# Altium PCB Resolver_PCB.PcbDoc (part 1 of 2)
Units mm, origin at the board's own origin, x right, y up, seen from the top; angles counter-clockwise.
Board outline 113.4 x 54.46 mm, 2 copper layers (Top Layer, Bottom Layer); 126 components, 86 nets, 363 pads, 149 vias.
Unrouted connection lines stored in the file: 1.
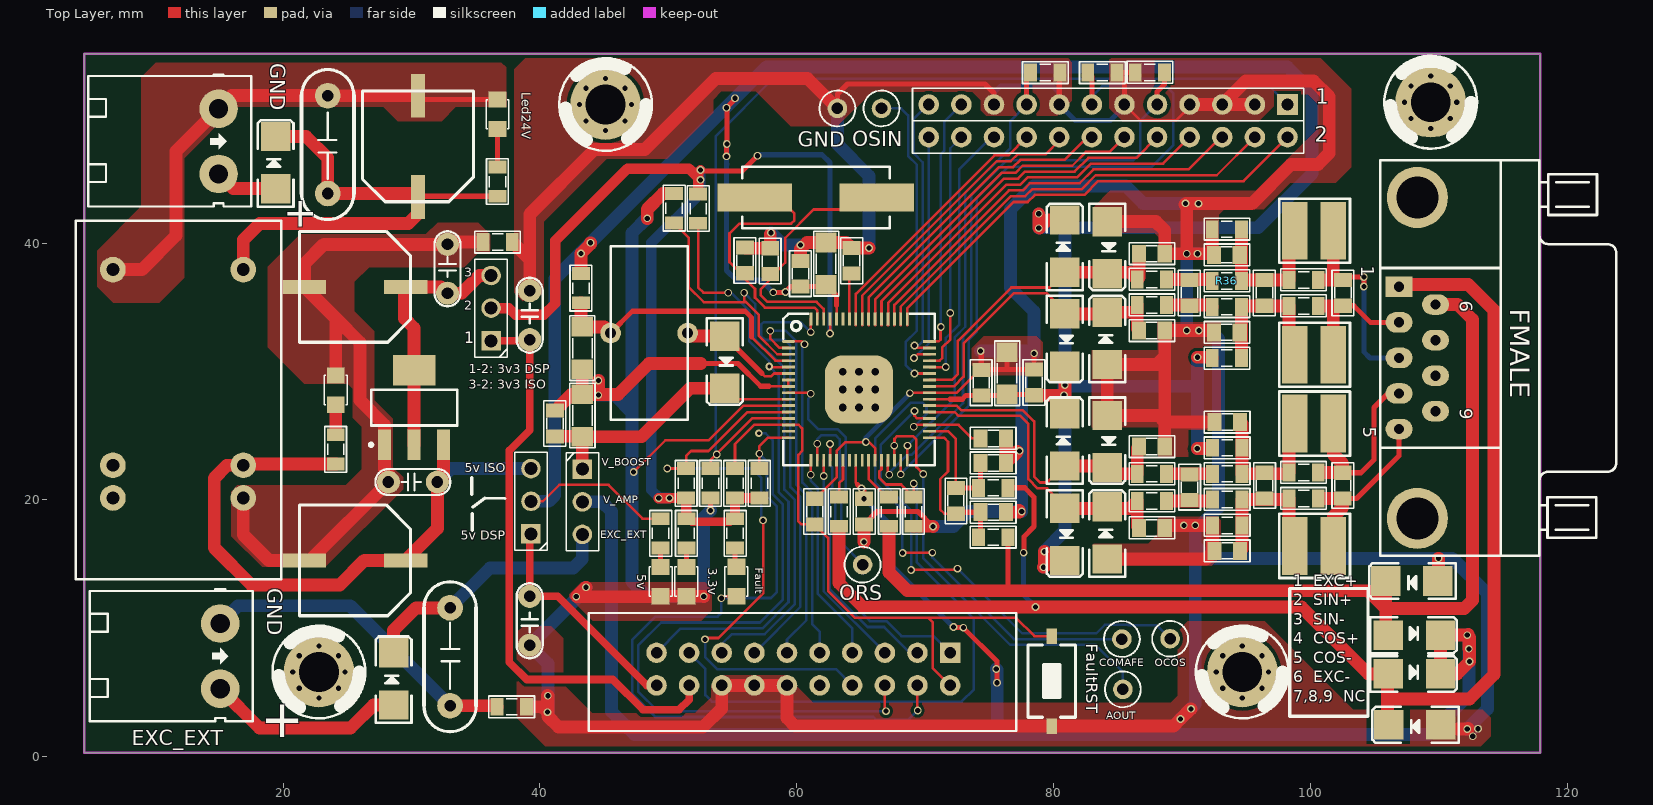
[diagram p0: Top Layer view]
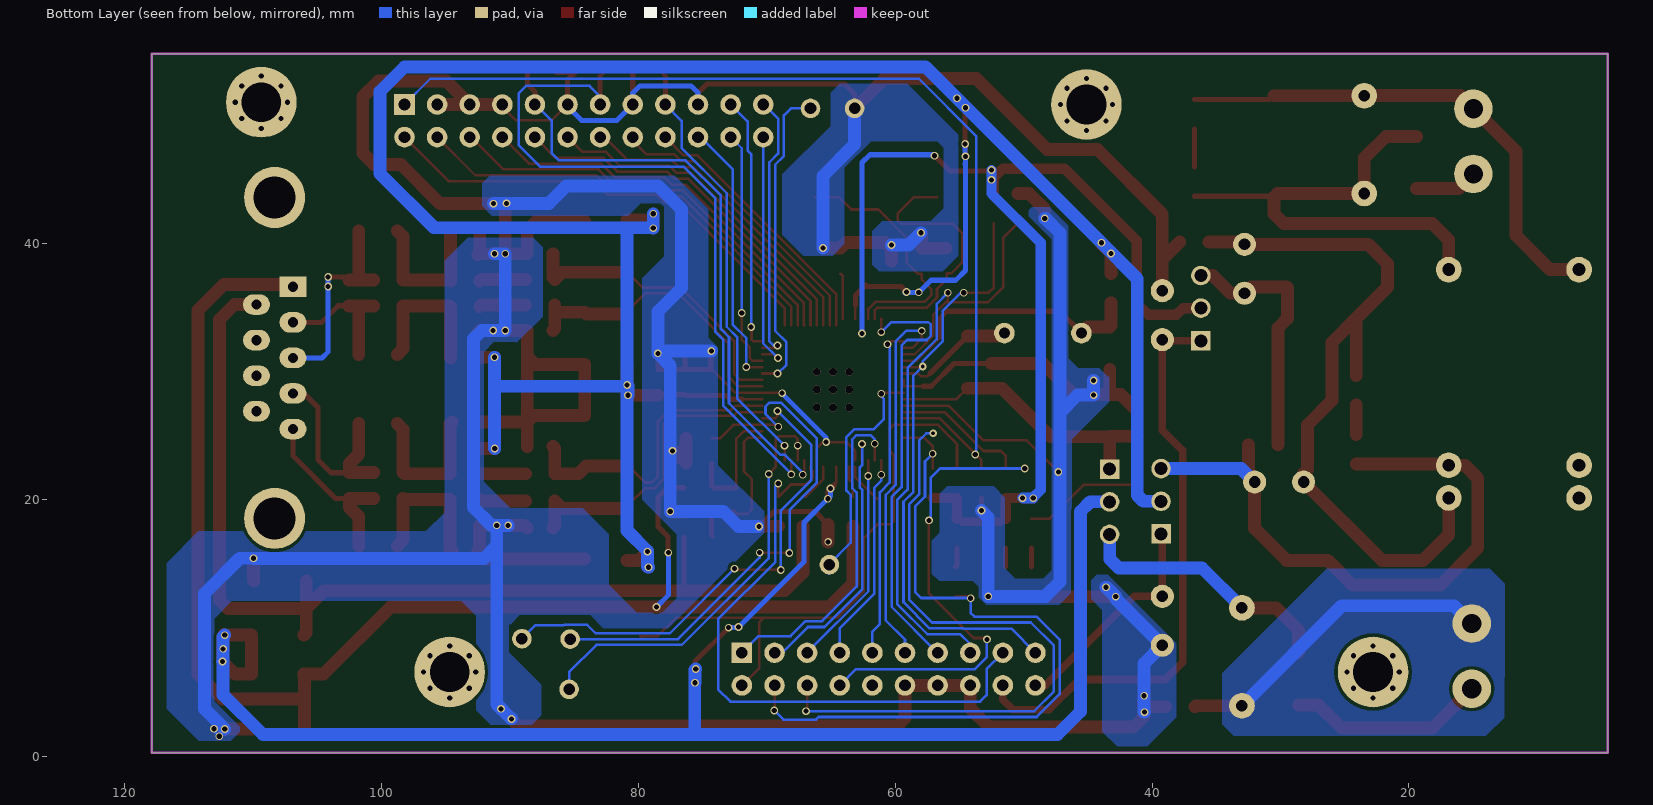
[diagram p1: Bottom Layer view, seen from below]

## Layer stack, top to bottom
Top Solder: solder mask 0.0102, Solder Resist, Dk 3.5
Top Layer: signal copper 0.0356
Dielectric 1: dielectric 0.32, FR-4, Dk 4.8
Bottom Layer: signal copper 0.0356
Bottom Solder: solder mask 0.0102, Solder Resist, Dk 3.5

## Board outline
4.5,0.3 4.5,54.762 117.9,54.762 117.9,0.3

## Design rules (kind name [scope] priority, off if disabled: settings)
Clearance Clearance_1 [InNet('GND_24V_EXT')] p1: gap=0.6 ignorepadtopadclearanceinfootprint=FALSE except(0: Arc-Hole Track-Hole SMDPad-Hole THPad-Hole Via-Hole Fill-Hole Poly-Hole Region-Hole Text-Hole)
Clearance [All] p2: gap=0.254 ignorepadtopadclearanceinfootprint=FALSE except(0: Arc-Hole Track-Hole SMDPad-Hole THPad-Hole Via-Hole Fill-Hole Poly-Hole Region-Hole Text-Hole)
PlaneClearance [All] p1: clearance=0.4
PolygonConnect [All] p1: connectstyle=Direct reliefconductorwidth=0.254 reliefentries=4 polygonreliefangle="90 Angle" airgapwidth=0.254
RoutingVias [All] p1: holewidth=0.4 width=0.6 viastyle="Through Hole" minholewidth=0.4 minwidth=0.6 maxholewidth=0.4 maxwidth=0.6
SolderMaskExpansion [All] p1: expansion=0.102
Width [All] p1: maxlimit=1 minlimit=0.2 preferedwidth=0.4
29 further rules are at their usual default settings.

## Classes and differential pairs
component class Resolver: R34

## Components (designator, comment, footprint, x,y, rotation, side; value= is the part's Value field where it differs from the comment)
C1 "470uF/10V" "CP 470uF/35V SMD 10x10mm" 25.6,36.6 r180 top value=100uF/35V/50V
C2 "104" CN1.5 32.8,39.91 r270 top value=0.01uF
C3 "470uF/35V" "CP 470uF/35V SMD 10x10mm" 30.5,47.537 r90 top value=100uF/35V/50V
C4 "104/630V" CN3 23.474,51.489 r270 top value=0,047uF
C5 "470uF/16V" "CP 470uF/35V SMD 10x10mm" 25.6,15.3 r180 top value=100uF/35V/50V
C6 "104" CN1.5 28.2,21.4 r0 top value=0.01uF
C7 "104/630V" CN3 33,3.98 r90 top value=0,047uF
C8 "104" CN1.5 39.2,8.69 r90 top value=0.01uF
C9 "104" CN1.5 39.2,36.3 r270 top value=0.01uF
C10 "JP3" JP3-CLOSED 43.3,22.4 r270 top
COM1 "COM 9 FMALE" "DSB 9-F" 108.331,31.066 r270 top value="COM 9"
Cx1 "0.1uF" CN-SMD-0805 61.4,19.1 r270 top value=33pF
Cx2 "1uF" CN-SMD-0805 78.487,29.156 r270 top value=33pF
Cx3 "10uF" CN-SMD-1206 76.378,29.896 r270 top value=33pF
Cx4 "0.1uF" CN-SMD-0805 74.371,29.134 r270 top value=33pF
Cx5 "10uF" CN-SMD-1206 43.3,31.8 r90 top value=33pF
Cx6 "0.1uF" CN-SMD-0805 41.173,25.959 r270 top value=33pF
Cx7 "10uF" CN-SMD-1206 43.3,26.6 r270 top value=33pF
Cx8 "0.1uF" CN-SMD-0805 64.262,38.633 r90 top value=33pF
Cx9 "0.1uF" CN-SMD-0805 65.25,19.1 r90 top value=33pF
Cx10 "68pF" CN-SMD-0805 75.3,22.875 r180 top value=33pF
Cx11 "68pF" CN-SMD-0805 72.39,19.929 r90 top value=33pF
Cx12 "68pF" CN-SMD-0805 75.3,19.05 r0 top value=33pF
Cx13 "10uF" CN-SMD-1206 62.281,38.43 r270 top value=33pF
Cx14 "0.1uF" CN-SMD-0805 60.3,37.624 r270 top value=33pF
Cx15 "470pF" CN-SMD-0805 93.52,26.076 r0 top value=33pF
Cx16 "0.01uF" CN-SMD-0805 75.3,24.8 r180 top value=33pF
Cx17 "68pF" CN-SMD-0805 90.583,20.997 r90 top value=33pF
Cx18 "68pF" CN-SMD-0805 96.425,21.124 r90 top value=33pF
Cx19 "1uF" CN-SMD-0805 102.521,21.124 r90 top value=33pF
Cx20 "68pF" CN-SMD-0805 87.662,17.822 r180 top value=33pF
Cx21 "470pF" CN-SMD-0805 93.52,16.044 r0 top value=33pF
Cx22 "68pF" CN-SMD-0805 87.662,24.172 r0 top value=33pF
Cx23 "15pF" CN-SMD-0805 55.982,38.659 r270 top value=33pF
Cx24 "15pF" CN-SMD-0805 57.937,38.608 r270 top value=33pF
Cx25 "470pF" CN-SMD-0805 93.504,33.06 r0 top value=33pF
Cx26 "68pF" CN-SMD-0805 90.583,36.129 r270 top value=33pF
Cx27 "68pF" CN-SMD-0805 96.425,36.129 r270 top value=33pF
Cx28 "1uF" CN-SMD-0805 102.546,36.129 r270 top value=33pF
Cx29 "470pF" CN-SMD-0805 93.504,39.095 r0 top value=33pF
Cx30 "68pF" CN-SMD-0805 87.662,39.177 r180 top value=33pF
Cx31 "68pF" CN-SMD-0805 87.662,33.208 r0 top value=33pF
D1 "1N4007" DIO-SMD-106 19.41,46.282 r270 top
D2 "1N4007" DIO-SMD-106 28.6,6.068 r270 top
DIO1 "Diode SMD" DIO-SMD-106 108.102,6.452 r180 top value=1N5007
DIO2 "Diode SMD" DIO-SMD-106 108.102,9.474 r180 top value=1N5007
DIO3 "Diode SMD" DIO-SMD-106 108.128,2.489 r0 top value=1N5007
DIO4 "Diode SMD" DIO-SMD-106 107.899,13.691 r0 top value=1N5007
DIO5 "Diode SMD" DIO-SMD-106 80.88,24.68 r270 top value=1N5007
DIO6 "Diode SMD" DIO-SMD-106 80.88,17.314 r90 top value=1N5007
DIO7 "Diode SMD" DIO-SMD-106 84.182,17.441 r270 top value=1N5007
DIO8 "Diode SMD" DIO-SMD-106 84.182,24.553 r90 top value=1N5007
DIO9 "Diode SMD" DIO-SMD-106 80.88,32.462 r90 top value=1N5007
DIO10 "Diode SMD" DIO-SMD-106 80.88,39.772 r270 top value=1N5007
DIO11 "Diode SMD" DIO-SMD-106 84.182,32.589 r270 top value=1N5007
DIO12 "Diode SMD" DIO-SMD-106 84.182,39.645 r90 top value=1N5007
HD1 "Header 2" HED2T 14.975,50.473 r270 top
HD2 "Header 10x2" "IDE 20" 71.94,8.1 r180 top value="Header 5x2"
HD3 "Header 2" HED2T 15.1,10.38 r270 top
IC1 "TEL8-2411" TEL8-2411 6.74,22.7 r270 top
IC2 "LM1117" SOT223-4N 30.2,27.2 r90 top value=LM317
IC3 "PGA411" PGA411 64.85,28.6 r0 top
J1 "Jumper 3" JP3-CLOSED 39.3,17.36 r90 top value=J3
J2 "Jumper 3" JP3-CLOSED 36.2,32.4 r90 top value=J3
J3 "Connector 12x2" JP12X2 98.22,50.8 r180 top value="Connector 4x2"
L1 "L-DIP-56uH" L-DIP-M-13.5x6 48.5,33 r0 top value="150 mH"
L2 "47uH" "L CD43" 100.286,25.95 r0 top
L3 "47uH" "L CD43" 100.286,16.425 r0 top
L4 "47uH" "L CD43" 100.286,31.319 r0 top
L5 "47uH" "L CD43" 100.286,40.971 r0 top
LED1 "LED 3mm" LED-0805-Red 36.7,48.9 r90 top value="LED 3 ly Single Colour"
LED2 "LED 3mm" LED-0805-Red 24.1,27.414 r90 top value="LED 3 ly Single Colour"
LED3 "LED 3mm" LED-0805-Red 49.4,14.786 r270 top value="LED 3 ly Single Colour"
LED4 "LED 3mm" LED-0805-Red 51.4,14.786 r270 top value="LED 3 ly Single Colour"
LED5 "LED 3mm" LED-0805-Red 55.3,14.8 r270 top value="LED 3 ly Single Colour"
R1 "4.7k" RES-SMD-0805 36.7,44.8 r270 top
R2 "1k" RES-SMD-0805 24.1,23.943 r270 top
R3 "0" RES-SMD-0805 36.7,40.1 r0 top value="R1/4W - 1K"
R4 "0" RES-SMD-0805 37.8,3.9 r0 top value="R1/4W - 1K"
R5 "1k" RES-SMD-0805 49.4,17.4 r90 top
R6 "560" RES-SMD-0805 51.4,17.4 r90 top
R7 "560" RES-SMD-0805 55.2,17.4 r90 top
R8 "0R" RES-SMD-0805 43.2,36.5 r270 top
R9 "0R" RES-SMD-0805 63.3,19.1 r90 top
R10 "0R" RES-SMD-0805 67.2,19.1 r90 top
R11 "68k" RES-SMD-0805 75.3,20.95 r180 top
R12 "10k" RES-SMD-0805 51.388,21.298 r270 top
R13 "68k" RES-SMD-0805 75.3,17.1 r180 top
R14 "10k" RES-SMD-0805 57.089,21.298 r270 top
R15 "10k" RES-SMD-0805 55.189,21.298 r270 top
R16 "51k" RES-SMD-0805 93.52,24.07 r0 top
R17 "27k" RES-SMD-0805 87.662,22.038 r180 top
R18 "27k" RES-SMD-0805 93.52,22.038 r180 top
R19 "0R" RES-SMD-0805 99.473,22.14 r180 top
R20 "10k" RES-SMD-0805 52.324,42.697 r90 top
R21 "27k" RES-SMD-0805 87.662,19.93 r180 top
R22 "27k" RES-SMD-0805 93.52,20.031 r180 top
R23 "0R" RES-SMD-0805 99.473,20.108 r180 top
R24 "10k" RES-SMD-0805 69.1,19.1 r270 top
R25 "20k" RES-SMD-0805 93.52,18.025 r180 top
R26 "10k" RES-SMD-0805 79.357,53.3 r0 top
R27 "10k" RES-SMD-0805 83.8,53.3 r0 top
R28 "10k" RES-SMD-0805 53.289,21.298 r270 top
R29 "10k" RES-SMD-0805 87.5,53.3 r180 top
R30 "10k" RES-SMD-0805 50.444,42.723 r90 top
R31 "51k" RES-SMD-0805 93.504,31.049 r0 top
R32 "27k" RES-SMD-0805 87.662,35.18 r180 top
R33 "27k" RES-SMD-0805 93.504,35.047 r180 top
R34 "0R" RES-SMD-0805 99.473,35.113 r180 top
R35 "27k" RES-SMD-0805 87.662,37.179 r180 top
R36 "27k" RES-SMD-0805 93.504,37.058 r180 top
R37 "0R" RES-SMD-0805 99.473,37.145 r180 top
R38 "20k" RES-SMD-0805 93.504,41.082 r180 top
SS1 "Diode SMD" DIO-SMD-106 54.381,30.734 r90 top value=1N5007
SW1 "SW" SW-SMD 79.858,5.893 r270 top value="SW chip 2 pin"
TP1 "TP" "Test Point" 85.319,9.169 r90 top value="Test Point"
TP2 "TP" "Test Point" 63.17,50.495 r0 top value="Test Point"
TP3 "TP" "Test Point" 65.126,14.961 r90 top value="Test Point"
TP4 "TP" "Test Point" 85.395,5.258 r90 top value="Test Point"
TP5 "TP" "Test Point" 89.078,9.195 r90 top value="Test Point"
TP6 "TP" "Test Point" 66.6,50.5 r90 top value="Test Point"
VIT1 "1" VIT 94.7,6.604 r0 top
VIT2 "1" VIT 109.372,50.978 r0 top
VIT3 "1" VIT 45.11,50.8 r0 top
VIT4 "1" VIT 22.784,6.604 r0 top
X1 "20Mhz" "XT2 SMD" 61.493,43.561 r0 top value=4Mhz

## Footprints (in the part's own frame and the unit in brackets; to place one, negate y for a bottom-side part, rotate by r counter-clockwise, add the part's x,y. Pads: shape width x height; smd on the part's side, far side on the other; paste and mask are expansions set on the pad)
CN1.5 [mm]
  round 1.8 hole 0.9: 1(0,0) 2(3.81,0)
  silkscreen extent -1.01,-1.02 4.82,1.02, body extent -1.01,-0.85 4.83,0.85, height 5.97
CN3 [mm] "Cap np W 0.3"
  round 2 hole 0.9: 1(0,0) 2(7.62,0)
  silkscreen extent -2.03,-2.03 9.65,2.03, body extent -0.59,-2 8.21,2, height 8
CN-SMD-0805 [mm]
  rect 1.1x1.397 smd: 1(-1,0) 2(1,0)
  silkscreen extent -1.78,-0.86 1.78,0.84, body extent -1,-0.62 1,0.63, height 0.8
CN-SMD-1206 [mil]
  rect 60x65 smd: 1(-64,0) 2(66,0)
  silkscreen extent -98,-38 100,39, body extent -63,-31 63,32, height 40
"CP 470uF/35V SMD 10x10mm" [mm] "10*10mm"
  rect 3.4x1.1 smd: 1(-3.937,0) 2(3.95,0)
  silkscreen extent -4.32,-4.32 4.32,4.32, body extent -4.95,-4.15 4.95,4.15, height 10.21
DIO-SMD-106 [mil]
  rect 90x90.55 smd: 1(80,0) 2(-80,0)
  silkscreen extent -130,-55 135,55, body extent -99,-50 106,52, height 95
"DSB 9-F" [mm] "COM FMALE - D Subminiature; 9 Position; Right Angle; Pitch 1.385 mm"
  rect 1.6x2.1 hole 0.8: 1(-5.54,-1.42)
  oval 1.6x2.1 hole 0.8: 2(-2.77,-1.42) 3(0,-1.42) 4(2.77,-1.42) 5(5.54,-1.42) 6(-4.155,1.42) 7(-1.385,1.42) 8(1.385,1.42) 9(4.155,1.42)
  round 4.76 hole 3.26: 10(-12.495,0) 11(12.495,0)
  silkscreen extent -15.4,-2.9 15.4,15.5, body extent -15.35,-3.51 15.46,15.57, height 12.56
HED2T [mm] "Header 2, 2 pin, hight 300mil, Pin to Pin 200, Colour Green"
  round 3 hole 1.5: 1(0,0) 2(5.08,0)
  silkscreen extent -2.67,-10.16 7.62,2.54, body extent -2.46,-10.14 7.54,1.86, height 8.47
"IDE 20" [mm]
  rect 1.6x1.6 hole 0.9: 1(0,0)
  round 1.6 hole 0.9: 2(0,2.54) 3(2.54,0) 4(2.54,2.54) 5(5.08,0) 6(5.08,2.54) 7(7.62,0) 8(7.62,2.54) 9(10.16,0) 10(10.16,2.54) 11(12.7,0) 12(12.7,2.54) 13(15.24,0) 14(15.24,2.54) 15(17.78,0) 16(17.78,2.54) 17(20.32,0) 18(20.32,2.54) 19(22.86,0) 20(22.86,2.54)
  silkscreen extent -5.16,-3.1 28.14,6.1, body extent -5.03,-2.95 27.97,5.9, height 9.13
JP3-CLOSED [mil]
  rect 60x60 hole 40: 1(0,0)
  round 60 hole 40: 2(100,0) 3(200,0)
  silkscreen extent -50,-50 250,50, body extent -52,-50 250,50, height 300
JP12X2 [mm]
  rect 1.6x1.6 hole 0.9: 1(0,0)
  round 1.6 hole 0.9: 2(0,2.54) 3(2.54,0) 4(2.54,2.54) 5(5.08,0) 6(5.08,2.54) 7(7.62,0) 8(7.62,2.54) 9(10.16,0) 10(10.16,2.54) 11(12.7,0) 12(12.7,2.54) 13(15.24,0) 14(15.24,2.54) 15(17.78,0) 16(17.78,2.54) 17(20.32,0) 18(20.32,2.54) 19(22.86,0) 20(22.86,2.54) 21(25.4,0) 22(25.4,2.54) 23(27.94,0) 24(27.94,2.54)
  silkscreen extent -1.27,-1.27 29.21,3.81, body extent -1.27,-1.27 29.21,3.81, height 8.52
"L CD43" [mm] "4.5x4x3.2mm"
  rect 2x4.5 smd: 1(-1.5,0) 2(1.5,0)
  silkscreen extent -2.7,-2.5 2.8,2.5, body extent -2.4,-2.15 2.4,2.15, height 3.51
L-DIP-M-13.5x6 [mm] "Body 13.5x6mm, 2 leads"
  round 1.6 hole 0.85: 1(-3,0) 2(3,0)
  silkscreen extent -3,-6.75 3,6.75, body extent -3.62,-7.35 3.62,7.35, height 14.8
LED-0805-Red [mil]
  rect 50x55 smd: 1(0,0) 2(90,0)
  silkscreen extent 0,-35 90,35, body extent 5,-25 85,25, height 43
PGA411 [mm]
  oval 1x0.22 smd: 1(-5.5,3.75)
  rect 1x0.22 smd: 2(-5.5,3.25) 3(-5.5,2.75) 4(-5.5,2.25) 5(-5.5,1.75) 6(-5.5,1.25) 7(-5.5,0.75) 8(-5.5,0.25) 9(-5.5,-0.25) 10(-5.5,-0.75) 11(-5.5,-1.25) 12(-5.5,-1.75) 13(-5.5,-2.25) 14(-5.5,-2.75) 15(-5.5,-3.25) 16(-5.5,-3.75) 33(5.5,-3.75) 34(5.5,-3.25) 35(5.5,-2.75) 36(5.5,-2.25) 37(5.5,-1.75) 38(5.5,-1.25) 39(5.5,-0.75) 40(5.5,-0.25) 41(5.5,0.25) 42(5.5,0.75) 43(5.5,1.25) 44(5.5,1.75) 45(5.5,2.25) 46(5.5,2.75) 47(5.5,3.25) 48(5.5,3.75)
  rect 0.22x1 smd: 17(-3.75,-5.5) 18(-3.25,-5.5) 19(-2.75,-5.5) 20(-2.25,-5.5) 21(-1.75,-5.5) 22(-1.25,-5.5) 23(-0.75,-5.5) 24(-0.25,-5.5) 25(0.25,-5.5) 26(0.75,-5.5) 27(1.25,-5.5) 28(1.75,-5.5) 29(2.25,-5.5) 30(2.75,-5.5) 31(3.25,-5.5) 32(3.75,-5.5) 49(3.75,5.5) 50(3.25,5.5) 51(2.75,5.5) 52(2.25,5.5) 53(1.75,5.5) 54(1.25,5.5) 55(0.75,5.5) 56(0.25,5.5) 57(-0.25,5.5) 58(-0.75,5.5) 59(-1.25,5.5) 60(-1.75,5.5) 61(-2.25,5.5) 62(-2.75,5.5) 63(-3.25,5.5) 64(-3.75,5.5)
  rrect50% 5.3x5.3 smd: ""(0,0)
  silkscreen extent -5.9,-5.9 5.9,5.9, body extent -5.75,-5.77 5.82,5.81, height 1.02
RES-SMD-0805 [mil] "Compoment SMD 80x50mil"
  rect 39.37x55 smd: 1(-45,0) 2(45,0)
  silkscreen extent -70,-34 70,33, body extent -39,-25 39,25, height 31
SOT223-4N [mm] "SOT223, 4-Leads, Body 6.5x3.5mm, Pitch 2.3mm, Lead Span 7mm, IPC Medium Density"
  rect 2.4x1 smd: 1(-2.9,2.3) 2(-2.9,0) 3(-2.9,-2.3)
  rect 2.4x3.3 smd: 4(2.9,0)
  silkscreen extent -3.02,-3.35 1.4,3.47, body extent -3.39,-3.27 3.5,3.23, height 1.72
SW-SMD [mm] "Switch SMD type"
  rect 1.2x0.8 smd: 1(-3.5,0) 2(3.5,0)
  silkscreen extent -2.82,-1.85 2.82,1.85, body extent -3.05,-1.85 3.05,1.85, height 2.5
TEL8-2411 [mm]
  round 2 hole 1: 1(-15.24,0) 7(0,0) 8(2.54,0) 9(2.54,10.16) 10(0,10.16) 16(-15.24,10.16)
  silkscreen extent -19.04,-2.9 8.86,13.1
"Test Point" [mil]
  round 60 hole 35.43: 1(0,0)
  silkscreen extent -55,-55 55,55, body extent -50,-50 50,50, height 192
VIT [mm] "VIT"
  round 5.5 hole 3.1: 1(0,0)
  silkscreen extent -3.61,-3.61 3.61,3.61
"XT2 SMD" [mm] "Crystal 2pin SMD"
  rect 5.8x2.2 smd: 1(-4.75,0) 2(4.75,0)
  silkscreen extent -5.75,-2.4 5.75,2.4, body extent -6.4,-2.41 6.4,2.42, height 4.3

## Part data
C1 C3 C5: library part CP3, "Cap 100uF/35V - 470uF/16V", Description 1="1000uF/6,3V - 470uF/16V - 330uF - 25V", Description 2="220uF/35V - 100uF/50V - 63V - 4,7uF/200V", Description 3="22uF => 33uF100V - 3,3uF => 4,7uF/250V", Description 4="2,2uF =>3,3uF/350 - 2,2uF/400V - 1uF/450V"
C2 C6 C8 C9: library part CN1.5, "Cap np 682pF => 104pF"
C4 C7: library part CN3, "Cap np W0.3", Copyright=VanDungEvn
C10: "WR-PHD 2.54 mm Angled Socket Header", Manufacturer="W¨¹rth Elektronik eiSos GmbH", partNo=613003143121, ComponentLink1 Description=Manufacturer, ComponentLink1URL=http://www.we-online.com, ComponentLink2 Description=Datasheet, ComponentLink2URL=http://katalog.we-online.de/em/datasheet/6130xx143121.pdf, Created by="Karrer Zheng", Created Date="29 March 2013", NoPins=03
COM1: library part DSB9F, "COM 9", PackageDocument=O, DatasheetDocument=1-Sep-1999, Gender=Receptacle, LatestRevisionDate=17-Jul-2002, LatestRevisionNote="Re-released for DXP Platform.", Orientation="Right Angle", PackageReference=788750, Positions=9, Published=15-Jun-2001, Publisher="Altium Limited"
Cx1 Cx2 Cx3 Cx4 Cx5 Cx6 Cx7 Cx8 Cx9 Cx10 Cx11 Cx12 Cx13 Cx14 Cx15 Cx16 Cx17 Cx18 Cx19 Cx20 Cx21 Cx22 Cx23 Cx24 Cx25 Cx26 Cx27 Cx28 Cx29 Cx30 Cx31: library part CN
D1 D2: library part D2A, "Diode 2A"
DIO1 DIO2 DIO3 DIO4 DIO5 DIO6 DIO7 DIO8 DIO9 DIO10 DIO11 DIO12 SS1: "Default Diode", Code - JEDEC=DO-214-AB, Published=8-Jun-2000, Publisher="Altium Limited", Revision="July-2002: Re-released for DXP Platform."
HD1 HD3: library part Hed2, "Header 2 (Green)"
HD2: library part HED10X2
IC2: "3v3"
J1 J2: library part JP3
J3: library part JP12x2
L1: library part L-DIP-1, "Inductor"
L2 L3 L4 L5: library part L-SMD-1, Inductance="1.0 µH", Manufacturer="Wurth Elektronik", partNo=78477010, ComponentLink1Description=Manufacturer, ComponentLink1URL=http://www.we-online.de, ComponentLink2Description=Datasheet, ComponentLink2URL=http://katalog.we-online.de/pbs/datasheet/78477010.pdf, Created by="Baojun Chen", Created Date=Nov.2015
LED1 LED2 LED3 LED4 LED5: "LED Single colour Green and Red"
R1 R2 R5 R6 R7: library part R-US_R0805, "RESISTOR, American symbol"
R3 R4: library part R1/4W, "Resistor 1/4W"
R8 R9 R10 R11 R12 R13 R14 R15 R16 R17 R18 R19 R20 R21 R22 R23 R24 R25 R26 R27 R28 R29 R30 R31 R32 R33 R34 R35 R36 R37 R38: library part Res-SMD, "Resistor", Manufacturer="Generic Components", Class=Passive, Published=08/06/2000, Publisher="Altium Hobart Technology Centre"
SW1: "Switch button 2 pin"
TP1 TP2 TP3 TP4 TP5 TP6: library part TP1, "Test Point"
VIT1 VIT2 VIT3 VIT4: library part VIT, "Oc Vit"
X1: library part XT2, "Crystal, 32.768 KHz, -40 to 85 degC, 3.2 x 1.5 x 0.9 mm SMD"

## Via types
v1: diameter 0.6, hole 0.4, Top Layer to Bottom Layer, 106 vias
v2: diameter 0.4, hole 0.4, Top Layer to Bottom Layer, 32 vias
v3: diameter 0.6, hole 0.6, Top Layer to Bottom Layer, 9 vias
v4: diameter 0.6, hole 0.3, Top Layer to Bottom Layer, 2 vias

## Nets (pads, with @x,y where several pads share a name; then routed paths per layer and width w, separated by ;. In a path a pad name is that pad's centre, name@x,y a point inside that pad or via, vN(x,y) a via of type N, cw(c..) or ccw(c..) an arc to the next point about the centre after c; other vN are vias at no path point)
3V3_DSP: C9.2 HD2.18 J2.1 | length 45.8
  Top Layer w0.6: J2.1@36.2,32.4 39.11,32.4 C9.2@39.2,32.49 39.2,25.433 37.617,23.851 37.617,7.366 38.964,6.02 45.669,6.02 48.031,3.658 50.825,3.658 51.62,4.452 HD2.18@51.62,5.56
3V3_ISO: C1.1 C2.2 IC2.2 IC2.4 J2.3 | length 20.1
  Top Layer w1: IC2.2@30.2,24.3 IC2.4@30.2,30.1 30.2,33.402 29.464,34.138 29.464,36.527 C1.1@29.537,36.6 32.3,36.6 C2.2@32.8,36.1 33.89,36.1 35.27,37.48 J2.3@36.2,37.48
3V3_VCC: IC3.61 J2.2 R6.2 R7.2 R12.2 R14.2 R15.2 R20.2 | length 95.2
  Top Layer w0.2: v1(62.586,32.969) 62.6,32.984 IC3.61@62.6,34.1
  Top Layer w0.4: R12.2@51.388,20.155 R12.2@51.4,20.143 ; R6.2@51.4,18.543 51.4,18.422 R7.2@55.079,18.422 ; R6.2@51.425,18.391 R6.2@51.444,18.372 ; R6.2@51.791,18.186 54.843,18.186 R7.2@55.079,18.422 ; v1@52.324,45.517 52.426,45.618 55.753,45.618 v1(56.947,46.812) ; R15.2@55.189,20.155 R15.2@55.2,20.144 ; R7.2@55.2,18.543 R7.2@55.079,18.422 ; R7.2@55.207,18.372 R7.2@55.225,18.391
  Top Layer w0.8: J2.2@36.2,34.94 37.577,34.94 38.1,34.417 40.31,34.417 41.199,35.306 41.199,40.183 46.812,45.796 51.613,45.796 v1@52.324,45.085 ; v1(49.251,20.142) v1(50.089,20.142) 50.102,20.155 R12.2@51.388,20.155 51.388,18.555 R6.2@51.4,18.543 ; R20.2@52.324,43.84 v1@52.324,45.085 ; v1@52.324,45.517 v1@52.324,45.085 ; v1@52.426,45.618 v1(52.502,45.695) ; R7.2@55.2,18.543 55.189,18.554 R15.2@55.189,20.155 R14.2@57.089,20.155
  Bottom Layer w0.4: v1(56.947,46.812) 57.023,46.888 61.976,46.888 62.586,46.279 v1(62.586,32.969)
  Bottom Layer w0.8: v1(49.251,20.142) 50.038,20.142 50.063,20.168 49.276,20.168 48.666,20.777 48.666,40.03 52.502,43.866 v1(52.502,44.933) v1(52.502,45.695)
5V_DSP: C8.2 HD2.20 J1.1 | length 17.7
  Top Layer w0.6: J1.1@39.3,17.36 39.2,17.26 C8.2@39.2,12.5 41.373,12.5 48.313,5.56 HD2.20@49.08,5.56
5V_ISO: C5.1 C6.2 IC1.10 IC2.3 J1.3 R2.2 | length 50.2
  Top Layer w1: R2.2@24.1,22.8 17,22.8 IC1.10@16.9,22.7 15.639,22.7 14.63,21.692 14.63,16.281 17.526,13.386 24.409,13.386 26.324,15.3 C5.1@29.537,15.3 32.01,17.773 C6.2@32.01,21.4 32.5,21.89 IC2.3@32.5,24.3
  Bottom Layer w1: C6.2@32.01,21.4 33.05,22.44 J1.3@39.3,22.44
5V_VCC: Cx2.2 Cx3.2 Cx4.2 Cx13.2 Cx14.2 DIO5.2 DIO6.2 DIO9.2 DIO10.2 IC3.39 IC3.60 J1.2 R5.2 R8.1 R16.1 R31.1 | length 228
  Top Layer w0.2: J1.2@39.3,19.9 40.22,19.9 41.504,21.184 45.339,21.184 47.98,18.543 R5.2@49.4,18.543 ; IC3.60@63.1,34.1 63.1,35.16 ; IC3.39@70.35,27.85 71.933,27.85
  Top Layer w0.4: v1(54.534,46.761) 54.534,47.701 v1(54.559,47.727) 54.559,50.47 54.508,50.521 v1(54.534,50.546) 55.194,51.206 v1(55.194,51.283) ; v1(58.166,36.17) 59.106,36.17 v1(59.131,36.195) 59.56,36.624 Cx14.2@60.3,36.624 62.151,36.624 Cx13.2@62.281,36.754 63.1,35.935 63.1,35.16 ; 71.933,27.85 72.884,27.85 73.168,28.134 Cx4.2@74.371,28.134 76.292,28.134 Cx3.2@76.378,28.219 78.424,28.219 Cx2.2@78.488,28.155 ; DIO5.2@80.88,26.712 80.88,28.092 v1(80.816,28.155) 80.816,28.892 v1(80.88,28.956) ; v1(91.186,24.003) v1@91.253,24.07 ; v1(91.211,31.115) v1@91.278,31.049
  Top Layer w1: R8.1@43.155,37.688 R8.1@43.2,37.643 43.2,39.187 v1(43.205,39.192) 43.942,39.929 v1(43.942,40.03) ; Cx2.2@78.488,28.155 v1(80.816,28.155) v1@80.88,28.219 ; v1(78.842,42.291) 78.842,41.224 78.892,41.173 79.523,41.804 DIO10.2@80.88,41.804 ; v1(79.223,14.757) 79.299,14.834 v1(79.299,15.977) 79.994,15.282 DIO6.2@80.88,15.282 ; v1@80.88,28.092 v1@80.88,28.219 ; DIO9.2@80.88,30.43 v1(80.88,28.956) v1@80.88,28.219 ; v1(91.186,24.003) 92.31,24.003 R16.1@92.377,24.07 ; v1(91.211,31.115) 92.294,31.115 R31.1@92.361,31.049
  Bottom Layer w0.4: 54.559,46.152 54.534,46.177 ; v1(54.559,47.727) 54.559,46.787 v1(54.534,46.761) 54.534,46.177 ; v1@59.233,36.144 59.207,36.17 v1(58.166,36.17) 57.226,37.109 55.296,37.109 54.534,37.871 54.534,46.177
  Bottom Layer w1: J1.2@39.3,19.9 40.677,19.9 41.148,20.371 41.148,37.236 v1(43.942,40.03) v1(55.194,51.283) 57.633,53.721 98.222,53.721 100.127,51.816 100.127,45.415 95.91,41.199 80.772,41.199 ; v1(78.842,42.291) v1(78.842,41.173) 78.867,41.199 80.772,41.199 ; v1(79.223,14.757) 79.299,14.834 v1(79.299,15.977) 79.299,16.027 80.88,17.609 v1(80.88,28.956) ; v1(80.816,28.155) 80.816,28.892 v1(80.88,28.956) ; v1(91.186,24.003) 91.211,24.028 91.211,28.854 ; v1(91.211,31.115) 91.211,28.854 ; 80.772,41.199 80.88,41.091 v1(80.88,28.956) ; v1(80.88,28.956) 80.982,28.854 91.211,28.854
24V_EXT: C3.1 C4.2 D1.2 IC1.16 R1.2 | length 39
  Top Layer w0.4: C3.1@30.5,43.6 30.557,43.657 R1.2@36.7,43.657
  Top Layer w1: IC1.16@16.9,37.94 16.9,40.25 18.179,41.529 29.743,41.529 30.5,42.286 C3.1@30.5,43.6 30.231,43.869 C4.2@23.474,43.869 23.474,46.63 21.79,48.314 D1.2@19.41,48.314
AMODE: HD2.17 IC3.28 R24.1 | length 48.6
  Top Layer w0.2: IC3.28@66.6,22.6 66.6,22.389 66.421,22.21 66.421,21.742 66.954,21.209 68.134,21.209 R24.1@69.1,20.243 69.113,20.256 v1(69.113,21.285)
  Bottom Layer w0.2: HD2.17@51.62,8.1 52.883,6.837 52.883,4.801 53.391,4.293 72.847,4.293 73.787,5.232 73.787,10.719 69.358,15.148 69.358,21.041 v1(69.113,21.285)
BMODE0: HD2.19 IC3.5 R20.1 | length 47.1
  Top Layer w0.2: R20.1@52.324,41.554 52.324,36.551 52.73,36.144 v1(54.661,36.144) ; v4(57.861,30.404) 57.915,30.35 IC3.5@59.35,30.35
  Bottom Layer w0.2: HD2.19@49.08,8.1 50.962,9.982 54.73,9.982 54.752,10.004 57.32,10.004 59.355,12.04 59.355,19.864 58.588,20.631 58.588,29.677 v4(57.861,30.404) 57.861,30.803 56.315,32.349 56.315,34.719 54.889,36.144 v1(54.661,36.144)
COS+: COM1.4 Cx19.2 L2.2 R19.1 | length 15.4
  Top Layer w0.4: Cx19.2@102.521,22.124 103.937,22.124 104.953,23.139 104.953,27.203 106.045,28.296 COM1.4@106.911,28.296
  Top Layer w1: R19.1@100.616,22.14 102.505,22.14 Cx19.2@102.521,22.124 102.521,22.828 101.786,23.563 L2.2@101.786,25.95
COS-: COM1.5 Cx19.1 L3.2 R23.1 | length 13.8
  Top Layer w0.4: Cx19.1@102.521,20.124 103.588,20.124 106.911,23.447 COM1.5@106.911,25.526
  Top Layer w1: R23.1@100.616,20.108 102.505,20.108 Cx19.1@102.521,20.124 102.521,19.437 101.786,18.702 L3.2@101.786,16.425
ECLKSEL: HD2.15 IC3.3 R30.1 | length 50.7
  Top Layer w0.2: R30.1@50.444,41.58 51.587,40.437 51.587,36.576 52.756,35.408 56.054,35.408 ; v1(55.905,36.144) 55.905,35.556 56.054,35.408 ; IC3.3@59.35,31.35 58.482,31.35 57.048,32.784 57.048,34.413 56.054,35.408
  Bottom Layer w0.2: HD2.15@54.16,8.1 54.16,8.77 54.94,9.55 57.508,9.55 59.833,11.875 59.833,20.029 59.042,20.819 59.042,30.264 56.769,32.537 56.769,35.281 v1(55.905,36.144)
EXC+: COM1.1 DIO1.1 DIO3.2 R9.1 R11.1 | length 111.7
  Top Layer w0.4: R11.1@76.443,20.95 77.754,20.95 78.486,20.218 78.486,17.932 77.699,17.145 77.699,15.926 v1(77.673,15.9)
  Top Layer w1: R9.1@63.3,17.957 63.3,13.535 65.16,11.675 v1(78.588,11.675) 99.298,11.675 104.521,6.452 DIO1.1@106.07,6.452 ; DIO3.2@106.02,2.159 106.02,4.496 ; DIO1.1@106.07,6.299 106.02,6.248 106.02,4.496 ; COM1.1@106.911,36.606 106.911,36.775 112.298,36.775 114.3,34.773 114.3,6.401 112.395,4.496 106.02,4.496
  Bottom Layer w0.4: v1(77.673,15.9) 77.673,12.589 v1(78.588,11.675)
EXC-: COM1.6 DIO2.1 DIO4.2 R10.1 R13.1 | length 84.4
  Top Layer w0.4: 76.443,12.638 76.443,12.929 R13.1@76.443,17.1
  Top Layer w1: R10.1@67.2,17.957 67.196,17.953 67.196,14.364 68.631,12.929 76.443,12.929 104.496,12.929 105.867,11.557 ; DIO4.2@105.867,13.691 105.867,11.557 ; DIO2.1@106.07,9.474 105.867,9.677 105.867,11.557 ; COM1.6@109.751,35.221 111.464,35.221 112.624,34.061 112.624,12.192 111.989,11.557 105.867,11.557
EXC_EXT: C7.2 C10.3 D2.2 | length 20.7
  Top Layer w1: D2.2@28.6,8.1 28.6,9.855 30.345,11.6 C7.2@33,11.6
  Bottom Layer w1: C7.2@33,11.6 36.107,14.707 42.596,14.707 43.3,15.411 C10.3@43.3,17.32
FAULT: HD2.4 IC3.16 LED5.2 R14.1 | length 60.6
  Top Layer w0.2: v1(54.127,12.344) 54.297,12.514 LED5.2@55.3,12.514 ; R14.1@57.089,22.441 v1(57.089,23.597) 57.089,24.196 57.743,24.85 IC3.16@59.35,24.85 ; HD2.4@69.4,5.56 69.4,3.625 v1(69.418,3.607)
  Bottom Layer w0.2: v1(57.089,23.597) 57.68,23.005 57.68,20.255 58.448,19.488 58.448,12.829 ; 58.448,13.614 58.448,12.829 ; v1(69.418,3.607) 68.713,2.902 66.161,2.902 65.961,3.102 48.986,3.102 47.196,4.892 47.196,9.122 48.987,10.912 53.838,10.912 54.127,11.201 v1(54.127,12.344) 54.153,12.37 57.988,12.37 58.448,12.829
FAULTRES: Cx1.2 HD2.2 IC3.14 R15.1 SW1.1 | length 47.3
  Top Layer w0.2: R15.1@55.189,22.441 55.189,24.353 56.686,25.851 IC3.14@59.35,25.85 ; IC3.14@59.35,25.85 60.154,25.85 60.427,25.578 60.427,23.825 60.122,23.52 60.122,18.339 60.361,18.1 Cx1.2@61.4,18.1 62.446,17.054 62.446,12.916 64.541,10.821 70.256,10.821 ; HD2.2@71.94,5.56 70.587,6.913 70.587,10.49 70.256,10.821 ; SW1.1@79.685,9.22 SW1.1@79.858,9.393 78.517,9.393 77.089,10.821 70.256,10.821
GND_24V_EXT: C3.2 C4.1 HD1.1 IC1.1 LED1.2 | length 39.5
  Top Layer w0.4: C3.2@30.5,51.487 30.801,51.186 LED1.2@36.7,51.186
  Top Layer w1: IC1.1@6.74,37.94 9.009,37.94 11.659,40.589 11.659,47.157 HD1.1@14.975,50.473 15.991,51.489 C4.1@23.474,51.489 23.476,51.487 C3.2@30.5,51.487